# EAGLE board CT_schematic (EAGLE 7.6.0)

Size 100 x 80 mm. Coordinates in mm from the lower left corner, seen from the top.
Outline: 0,0 100,0 100,80 0,80 0,0
Copper layers (1*16): Top 0.035mm / dielectric 1.5mm / Bottom 0.035mm
Design rules "default": minimum track width 10mil, minimum drill 24mil, track to track 8mil, track to pad 8mil, pad to pad 8mil, via to via 8mil, smd to smd 8mil, copper to edge 40mil, drill to drill 8mil, minimum pad ring 10mil, minimum via ring 8mil, stop-mask expansion 4mil, vias tented up to drill 0mil, thermal gap 10mil

## Footprints (pad centres in the part's own frame; a part is rotated, then mirrored left to right if it is on the bottom)
C0603 = smd 0.8 x 0.8: 1 -0.762,0; 2 0.762,0
C0402 = smd 0.5 x 0.5: 1 -0.508,0; 2 0.508,0
C1210 = smd 1.2 x 2.5: 1 -1.524,0; 2 1.524,0
C0805 = smd 1.2 x 1.3: 1 -1.016,0; 2 1.016,0
R0603 = smd 0.8 x 0.8: 1 -0.762,0; 2 0.762,0
EXV-9H = smd 3.505 x 1.676: 1 -2.857,0; 2 2.857,0
L0603 = smd 0.8 x 0.8: 1 -0.762,0; 2 0.762,0
PJ-037B_PACKAGE = drill 3.7 square: 1 12,0 | drill 3.2 square: 2 6,0
UFBGA176 = smd 0.3 x 0.3: A1 0,0; A2 0.65,0; A3 1.3,0; A4 1.95,0; A5 2.6,0; A6 3.25,0; A7 3.9,0; A8 4.55,0; A9 5.2,0; A10 5.85,0; A11 6.5,0; A12 7.15,0; A13 7.8,0; A14 8.45,0; A15 9.1,0; B1 0,-0.65; B2 0.65,-0.65; B3 1.3,-0.65; B4 1.95,-0.65; B5 2.6,-0.65; B6 3.25,-0.65; B7 3.9,-0.65; B8 4.55,-0.65; B9 5.2,-0.65; B10 5.85,-0.65; B11 6.5,-0.65; B12 7.15,-0.65; B13 7.8,-0.65; B14 8.45,-0.65; B15 9.1,-0.65; C1 0,-1.3; C2 0.65,-1.3; C3 1.3,-1.3; C4 1.95,-1.3; C5 2.6,-1.3; C6 3.25,-1.3; C7 3.9,-1.3; C8 4.55,-1.3; C9 5.2,-1.3; C10 5.85,-1.3; C11 6.5,-1.3; C12 7.15,-1.3; C13 7.8,-1.3; C14 8.45,-1.3; C15 9.1,-1.3; D1 0,-1.95; D2 0.65,-1.95; D3 1.3,-1.95; D4 1.95,-1.95; D5 2.6,-1.95; D6 3.25,-1.95; D7 3.9,-1.95; D8 4.55,-1.95; D9 5.2,-1.95; D10 5.85,-1.95; D11 6.5,-1.95; D12 7.15,-1.95; D13 7.8,-1.95; D14 8.45,-1.95; D15 9.1,-1.95; E1 0,-2.6; E2 0.65,-2.6; E3 1.3,-2.6; E4 1.95,-2.6; E12 7.15,-2.6; E13 7.8,-2.6; E14 8.45,-2.6; E15 9.1,-2.6; F1 0,-3.25; F2 0.65,-3.25; F3 1.3,-3.25; F4 1.95,-3.25; F6 3.25,-3.25; F7 3.9,-3.25; F8 4.55,-3.25; F9 5.2,-3.25; F10 5.85,-3.25; F12 7.15,-3.25; F13 7.8,-3.25; F14 8.45,-3.25; F15 9.1,-3.25; G1 0,-3.9; G2 0.65,-3.9; G3 1.3,-3.9; G4 1.95,-3.9; G6 3.25,-3.9; G7 3.9,-3.9; G8 4.55,-3.9; G9 5.2,-3.9; G10 5.85,-3.9; G12 7.15,-3.9; G13 7.8,-3.9; G14 8.45,-3.9; G15 9.1,-3.9; H1 0,-4.55; H2 0.65,-4.55; H3 1.3,-4.55; H4 1.95,-4.55; H6 3.25,-4.55; H7 3.9,-4.55; H8 4.55,-4.55; H9 5.2,-4.55; H10 5.85,-4.55; H12 7.15,-4.55; H13 7.8,-4.55; H14 8.45,-4.55; H15 9.1,-4.55; J1 0,-5.2; J2 0.65,-5.2; J3 1.3,-5.2; J4 1.95,-5.2; J6 3.25,-5.2; J7 3.9,-5.2; J8 4.55,-5.2; J9 5.2,-5.2; J10 5.85,-5.2; J12 7.15,-5.2; J13 7.8,-5.2; J14 8.45,-5.2; J15 9.1,-5.2; K1 0,-5.85; K2 0.65,-5.85; K3 1.3,-5.85; K4 1.95,-5.85; K6 3.25,-5.85; K7 3.9,-5.85; K8 4.55,-5.85; K9 5.2,-5.85; K10 5.85,-5.85; K12 7.15,-5.85; K13 7.8,-5.85; K14 8.45,-5.85; K15 9.1,-5.85; L1 0,-6.5; L2 0.65,-6.5; L3 1.3,-6.5; L4 1.95,-6.5; L12 7.15,-6.5; L13 7.8,-6.5; L14 8.45,-6.5; L15 9.1,-6.5; M1 0,-7.15; M2 0.65,-7.15; M3 1.3,-7.15; M4 1.95,-7.15; M5 2.6,-7.15; M6 3.25,-7.15; M7 3.9,-7.15; M8 4.55,-7.15; M9 5.2,-7.15; M10 5.85,-7.15; M11 6.5,-7.15; M12 7.15,-7.15; M13 7.8,-7.15; M14 8.45,-7.15; M15 9.1,-7.15; N1 0,-7.8; N2 0.65,-7.8; N3 1.3,-7.8; N4 1.95,-7.8; N5 2.6,-7.8; N6 3.25,-7.8; N7 3.9,-7.8; N8 4.55,-7.8; N9 5.2,-7.8; N10 5.85,-7.8; N11 6.5,-7.8; N12 7.15,-7.8; N13 7.8,-7.8; N14 8.45,-7.8; N15 9.1,-7.8; P1 0,-8.45; P2 0.65,-8.45; P3 1.3,-8.45; P4 1.95,-8.45; P5 2.6,-8.45; P6 3.25,-8.45; P7 3.9,-8.45; P8 4.55,-8.45; P9 5.2,-8.45; P10 5.85,-8.45; P11 6.5,-8.45; P12 7.15,-8.45; P13 7.8,-8.45; P14 8.45,-8.45; P15 9.1,-8.45; R1 0,-9.1; R2 0.65,-9.1; R3 1.3,-9.1; R4 1.95,-9.1; R5 2.6,-9.1; R6 3.25,-9.1; R7 3.9,-9.1; R8 4.55,-9.1; R9 5.2,-9.1; R10 5.85,-9.1; R11 6.5,-9.1; R12 7.15,-9.1; R13 7.8,-9.1; R14 8.45,-9.1; R15 9.1,-9.1
DFN-10 = smd 0.965 x 0.305: 1 -1.321,1; 2 -1.321,0.5; 3 -1.321,0; 4 -1.321,-0.5; 5 -1.321,-1; 6 1.321,-1; 7 1.321,-0.5; 8 1.321,0; 9 1.321,0.5; 10 1.321,1
LBGA-64 = smd 0.559 x 0.559: A1 -3.5,3.5; A2 -2.5,3.5; A3 -1.5,3.5; A4 -0.5,3.5; A5 0.5,3.5; A6 1.5,3.5; A7 2.5,3.5; A8 3.5,3.5; B1 -3.5,2.5; B2 -2.5,2.5; B3 -1.5,2.5; B4 -0.5,2.5; B5 0.5,2.5; B6 1.5,2.5; B7 2.5,2.5; B8 3.5,2.5; C1 -3.5,1.5; C2 -2.5,1.5; C3 -1.5,1.5; C4 -0.5,1.5; C5 0.5,1.5; C6 1.5,1.5; C7 2.5,1.5; C8 3.5,1.5; D1 -3.5,0.5; D2 -2.5,0.5; D3 -1.5,0.5; D4 -0.5,0.5; D5 0.5,0.5; D6 1.5,0.5; D7 2.5,0.5; D8 3.5,0.5; E1 -3.5,-0.5; E2 -2.5,-0.5; E3 -1.5,-0.5; E4 -0.5,-0.5; E5 0.5,-0.5; E6 1.5,-0.5; E7 2.5,-0.5; E8 3.5,-0.5; F1 -3.5,-1.5; F2 -2.5,-1.5; F3 -1.5,-1.5; F4 -0.5,-1.5; F5 0.5,-1.5; F6 1.5,-1.5; F7 2.5,-1.5; F8 3.5,-1.5; G1 -3.5,-2.5; G2 -2.5,-2.5; G3 -1.5,-2.5; G4 -0.5,-2.5; G5 0.5,-2.5; G6 1.5,-2.5; G7 2.5,-2.5; G8 3.5,-2.5; H1 -3.5,-3.5; H2 -2.5,-3.5; H3 -1.5,-3.5; H4 -0.5,-3.5; H5 0.5,-3.5; H6 1.5,-3.5; H7 2.5,-3.5; H8 3.5,-3.5
USON-8 = smd 0.3 x 0.4: 1 0,0; 2 0.5,0; 3 1,0; 4 1.5,0; 5 1.5,2.4; 6 1,2.4; 7 0.5,2.4; 8 0,2.4 | smd 1.65 x 0.25: 9 0.75,1.2
RHB32_3P45X3P45 = smd 0.85 x 0.28: 1 -2.475,1.75; 2 -2.475,1.25; 3 -2.475,0.75; 4 -2.475,0.25; 5 -2.475,-0.25; 6 -2.475,-0.75; 7 -2.475,-1.25; 8 -2.475,-1.75; 17 2.475,-1.75; 18 2.475,-1.25; 19 2.475,-0.75; 20 2.475,-0.25; 21 2.475,0.25; 22 2.475,0.75; 23 2.475,1.25; 24 2.475,1.75 | smd 0.28 x 0.85: 9 -1.75,-2.475; 10 -1.25,-2.475; 11 -0.75,-2.475; 12 -0.25,-2.475; 13 0.25,-2.475; 14 0.75,-2.475; 15 1.25,-2.475; 16 1.75,-2.475; 25 1.75,2.475; 26 1.25,2.475; 27 0.75,2.475; 28 0.25,2.475; 29 -0.25,2.475; 30 -0.75,2.475; 31 -1.25,2.475; 32 -1.75,2.475 | smd 3.45 x 3.45: 33 0,0
MICRO_USB_AB = smd 0.4 x 1.35: 1 1.3,0.26; 2 0.65,0.26; 3 0,0.26; 4 -0.65,0.26; 5 -1.3,0.26 | drill 0.6 pad 0.95 long: 6 4.175,-2.54; 7 -4.175,-2.54 | drill 0.7 pad 1.1 long: 8 -2.225,0.46; 9 2.225,0.46
SOT143B = smd 1 x 0.7: 1 -0.75,-1 | smd 0.6 x 0.7: 2 0.95,-1; 3 0.95,1; 4 -0.95,1
SOT-23-6 = smd 1.1 x 0.6: 1 -1.4,0.95; 2 -1.4,0; 3 -1.4,-0.95; 4 1.4,-0.95; 5 1.4,0; 6 1.4,0.95
FCI_10118193-0001LF = smd 0.4 x 1.35: 1 -1.3,2.675; 2 -0.65,2.675; 3 0,2.675; 4 0.65,2.675; 5 1.3,2.675 | smd 1.6 x 1.4: 6 -3.2,2.45; 7 3.2,2.45 | smd 1.9 x 1.9: 8 -1.2,0; 9 1.2,0 | hole 0.5: -3.3,0; 3.3,0
ASEK = smd 1.4 x 1: 1 -1.1,-0.8; 2 1.1,-0.8; 3 1.1,0.8; 4 -1.1,0.8
ASFL1 = smd 1.7 x 1.5: 1 -1.27,-1.1; 2 1.27,-1.1; 3 1.27,1.1; 4 -1.27,1.1
WSON-8 = smd 0.3 x 0.6: 1 -0.75,0; 2 0.05,0; 3 0.85,0; 4 1.65,0; 5 1.65,3.8; 6 0.85,3.8; 7 0.05,3.8; 8 -0.75,3.8 | smd 3 x 2.6: PAD 0.45,1.9
QFN-38_UHF = smd 0.75 x 0.3: 1 -2.4,2.75; 2 -2.4,2.25; 3 -2.4,1.75; 4 -2.4,1.25; 6 -2.4,0.25; 7 -2.4,-0.25; 8 -2.4,-0.75; 9 -2.4,-1.25; 10 -2.4,-1.75; 11 -2.4,-2.25; 12 -2.4,-2.75; 20 2.4,-2.75; 21 2.4,-2.25; 22 2.4,-1.75; 23 2.4,-1.25; 24 2.4,-0.75; 25 2.4,-0.25; 26 2.4,0.25; 27 2.4,0.75; 28 2.4,1.25; 29 2.4,1.75; 30 2.4,2.25; 31 2.4,2.75 | smd 0.758 x 0.3: 5 -2.4,0.75 | smd 0.3 x 0.75: 13 -1.5,-3.4; 14 -1,-3.4; 15 -0.5,-3.4; 16 0,-3.4; 17 0.5,-3.4; 18 1,-3.4; 19 1.5,-3.4; 32 1.5,3.4; 33 1,3.4; 34 0.5,3.4; 35 0,3.4; 36 -0.5,3.4; 37 -1,3.4; 38 -1.5,3.4 | smd 3.2 x 5.2: 39 0,0
IRF8306MTRPBF = smd 0.9 x 1.85: 1 0,0; 2 0,-2.35; 6 6.4,0; 7 6.4,-2.35 | smd 0.75 x 0.75: 3 1.75,-1.175 | smd 1.45 x 0.87: 4 3.5,-0.565; 5 3.5,-1.785
SW_4-1437565-2 = smd 1.4 x 2.1: 1 -2.23,4.55; 2 -2.23,-4.55; 3 2.23,4.55; 4 2.23,-4.55
LGM67K-G1J2-24-Z = smd 0.8 x 1.4: A -2,0; C 0,0
NC7SZ125M5X = smd 1.3 x 0.7: 1 -1.3,0.95; 2 -1.3,0; 3 -1.3,-0.95; 4 1.3,-0.95; 5 1.3,0.95
DUMMY_PACKAGE_324 = drill 0.3: 1 0,-1; 2 1.5,-1

## Placement (x,y rotation side)
C1  1e-06  [C0603]  -34.29,72.39 0 top  (outside the outline)
C2  1e-07  [C0603]  -38.1,72.39 0 top  (outside the outline)
C3  1e-07  [C0603]  -41.91,72.39 0 top  (outside the outline)
C4  1e-07  [C0603]  -45.72,72.39 0 top  (outside the outline)
C5  1e-07  [C0603]  -49.53,72.39 0 top  (outside the outline)
C6  1e-07  [C0603]  -53.34,72.39 0 top  (outside the outline)
C7  1e-07  [C0603]  -57.15,72.39 0 top  (outside the outline)
C8  1e-07  [C0603]  -60.96,72.39 0 top  (outside the outline)
C9  1e-07  [C0603]  -64.77,72.39 0 top  (outside the outline)
C10  1e-07  [C0603]  -68.58,72.39 0 top  (outside the outline)
C11  1e-07  [C0603]  -72.39,72.39 0 top  (outside the outline)
C12  1e-07  [C0603]  -76.2,72.39 0 top  (outside the outline)
C13  1e-07  [C0603]  -80.01,72.39 0 top  (outside the outline)
C14  1e-07  [C0603]  -83.82,72.39 0 top  (outside the outline)
C15  1e-07  [C0603]  -15.24,77.47 0 top  (outside the outline)
C16  1e-07  [C0603]  -19.05,77.47 0 top  (outside the outline)
C17  4.7e-06  [C0603]  -19.05,72.39 0 top  (outside the outline)
C18  1e-08  [C0603]  -22.86,77.47 0 top  (outside the outline)
C19  1e-06  [C0603]  -26.67,77.47 0 top  (outside the outline)
C20  1e-07  [C0603]  -30.48,77.47 0 top  (outside the outline)
C21  1e-07  [C0603]  -34.29,77.47 0 top  (outside the outline)
C22  1e-07  [C0603]  -38.1,77.47 0 top  (outside the outline)
C23  1e-06  [C0603]  -41.91,77.47 0 top  (outside the outline)
C24  1e-07  [C0402]  -49.53,82.55 0 top  (outside the outline)
C25  1e-07  [C0402]  -53.34,82.55 0 top  (outside the outline)
C26  1e-06  [C0603]  -45.72,77.47 0 top  (outside the outline)
C27  1e-07  [C0402]  -57.15,82.55 0 top  (outside the outline)
C28  1e-07  [C0402]  -60.96,82.55 0 top  (outside the outline)
C29  1e-08  [C0402]  -64.77,82.55 0 top  (outside the outline)
C30  1e-08  [C0402]  -68.58,82.55 0 top  (outside the outline)
C31  1e-07  [C0402]  -72.39,82.55 0 top  (outside the outline)
C32  1e-07  [C0402]  -76.2,82.55 0 top  (outside the outline)
C33  2.2e-06  [C0603]  -22.86,72.39 0 top  (outside the outline)
C34  1e-07  [C0402]  -80.01,82.55 0 top  (outside the outline)
C35  1e-07  [C0402]  -83.82,82.55 0 top  (outside the outline)
C36  2.2e-06  [C0603]  -26.67,72.39 0 top  (outside the outline)
C37  1e-06  [C0603]  -49.53,77.47 0 top  (outside the outline)
C38  1e-08  [C0402]  -87.63,82.55 0 top  (outside the outline)
C39  1e-08  [C0402]  -15.24,87.63 0 top  (outside the outline)
C40  1e-08  [C0402]  -19.05,87.63 0 top  (outside the outline)
C41  1e-08  [C0402]  -22.86,87.63 0 top  (outside the outline)
C42  1e-05  [C1210]  -59.69,48.26 0 top  (outside the outline)
C43  1e-05  [C0805]  -45.72,55.88 0 top  (outside the outline)
C44  1e-08  [C0402]  -26.67,87.63 0 top  (outside the outline)
C45  1e-05  [C1210]  -66.04,48.26 0 top  (outside the outline)
C46  1e-05  [C0805]  -50.8,55.88 0 top  (outside the outline)
C47  8e-07  [R0603]  -53.34,77.47 0 top  (outside the outline)
C48  1e-05  [C1210]  -72.39,48.26 0 top  (outside the outline)
C49  1e-08  [C0402]  -30.48,87.63 0 top  (outside the outline)
C50  1e-05  [C1210]  -78.74,48.26 0 top  (outside the outline)
C51  1e-05  [C1210]  -85.09,48.26 0 top  (outside the outline)
C52  1e-08  [C0402]  -34.29,87.63 0 top  (outside the outline)
C53  1e-05  [C1210]  -16.51,57.15 0 top  (outside the outline)
C54  1e-05  [C0805]  -55.88,55.88 0 top  (outside the outline)
C55  1e-07  [C0402]  -38.1,87.63 0 top  (outside the outline)
C56  2.2e-06  [C0603]  -30.48,72.39 0 top  (outside the outline)
C57  2.45e-08  [R0603]  -60.96,62.23 0 top  (outside the outline)
C58  2.8258362168397e-09  [R0603]  -66.04,55.88 0 top  (outside the outline)
C59  7.105e-09  [R0603]  -83.82,55.88 0 top  (outside the outline)
C60  0.0001  [EXV-9H]  -17.78,49.53 0 top  (outside the outline)
C61  0.0001  [EXV-9H]  -29.21,49.53 0 top  (outside the outline)
C62  1e-08  [C0402]  -41.91,87.63 0 top  (outside the outline)
C63  1e-08  [C0402]  -45.72,87.63 0 top  (outside the outline)
C64  1e-08  [C0402]  -49.53,87.63 0 top  (outside the outline)
F1  240.0  [L0603]  -57.15,77.47 0 top  (outside the outline)
J1  PJ-037B  [PJ-037B_PACKAGE]  -41.91,7.62 0 top  (outside the outline)
R2  1000.0  [R0603]  -60.96,77.47 0 top  (outside the outline)
R7  4700.0  [R0603]  -64.77,77.47 0 top  (outside the outline)
R8  4700.0  [R0603]  -68.58,77.47 0 top  (outside the outline)
R9  4700.0  [R0603]  -72.39,77.47 0 top  (outside the outline)
R10  2200.0  [R0603]  -76.2,77.47 0 top  (outside the outline)
R12  2200.0  [R0603]  -80.01,77.47 0 top  (outside the outline)
R14  10000.0  [R0603]  -66.04,62.23 0 top  (outside the outline)
R15  10000.0  [R0603]  -71.12,62.23 0 top  (outside the outline)
R16  10000.0  [R0603]  -76.2,62.23 0 top  (outside the outline)
R17  10000.0  [R0603]  -81.28,62.23 0 top  (outside the outline)
R18  10000.0  [R0603]  -86.36,62.23 0 top  (outside the outline)
R19  10000.0  [R0603]  -15.24,67.31 0 top  (outside the outline)
R20  10000.0  [R0603]  -20.32,67.31 0 top  (outside the outline)
R21  10000.0  [R0603]  -25.4,67.31 0 top  (outside the outline)
R22  10000.0  [R0603]  -30.48,67.31 0 top  (outside the outline)
R23  100000.0  [R0603]  -15.24,62.23 0 top  (outside the outline)
R24  100000.0  [R0603]  -20.32,62.23 0 top  (outside the outline)
R25  100000.0  [R0603]  -25.4,62.23 0 top  (outside the outline)
R26  47000.0  [R0603]  -35.56,67.31 0 top  (outside the outline)
R27  10000.0  [R0603]  -40.64,67.31 0 top  (outside the outline)
R28  10000.0  [R0603]  -45.72,67.31 0 top  (outside the outline)
R29  100000.0  [R0603]  -30.48,62.23 0 top  (outside the outline)
R30  200.0  [R0603]  -83.82,77.47 0 top  (outside the outline)
R31  1000.0  [R0603]  -15.24,82.55 0 top  (outside the outline)
R32  100000.0  [R0603]  -35.56,62.23 0 top  (outside the outline)
R33  806.0  [R0603]  -19.05,82.55 0 top  (outside the outline)
R34  1000.0  [R0603]  -22.86,82.55 0 top  (outside the outline)
R35  100000.0  [R0603]  -40.64,62.23 0 top  (outside the outline)
R36  153694.38  [R0603]  -78.74,55.88 0 top  (outside the outline)
R37  100000.0  [R0603]  -45.72,62.23 0 top  (outside the outline)
R38  100000.0  [R0603]  -50.8,62.23 0 top  (outside the outline)
R39  3900.0  [R0603]  -26.67,82.55 0 top  (outside the outline)
R40  1000.0  [R0603]  -30.48,82.55 0 top  (outside the outline)
R41  100000.0  [R0603]  -55.88,62.23 0 top  (outside the outline)
R42  200.0  [R0603]  -34.29,82.55 0 top  (outside the outline)
R43  1000.0  [R0603]  -38.1,82.55 0 top  (outside the outline)
R44  10000.0  [R0603]  -50.8,67.31 0 top  (outside the outline)
R45  75000.0  [R0603]  -55.88,67.31 0 top  (outside the outline)
R46  10000.0  [R0603]  -60.96,67.31 0 top  (outside the outline)
R47  10000.0  [R0603]  -66.04,67.31 0 top  (outside the outline)
R48  95300.0  [R0603]  -71.12,67.31 0 top  (outside the outline)
R49  95300.0  [R0603]  -76.2,67.31 0 top  (outside the outline)
R50  10000.0  [R0603]  -81.28,67.31 0 top  (outside the outline)
R51  10000.0  [R0603]  -86.36,67.31 0 top  (outside the outline)
R52  10000.0  [R0603]  -15.24,72.39 0 top  (outside the outline)
R53  103345.45454545  [R0603]  -73.66,55.88 0 top  (outside the outline)
U1  STM32F469IGH6  [UFBGA176]  -85.09,10.16 0 top  (outside the outline)
U2  MAG3110FCR1  [DFN-10]  -43.18,82.55 0 top  (outside the outline)
U3  mt28ew256aba1HPC-0SIT  [LBGA-64]  -19.05,7.62 0 top  (outside the outline)
U4  SST26WF080BT-104I/NP  [USON-8]  -53.34,86.36 0 top  (outside the outline)
U5  TUSB1210BRHBR  [RHB32_3P45X3P45]  -39.37,49.53 0 top  (outside the outline)
U6  47590-0001  [MICRO_USB_AB]  -50.8,7.62 0 top  (outside the outline)
U7  prtr5v0u2ax  [SOT143B]  -66.04,87.63 0 top  (outside the outline)
U8  MAX4995AAUT+T  [SOT-23-6]  -21.59,55.88 0 top  (outside the outline)
U9  10118193-0001LF  [FCI_10118193-0001LF]  -53.34,39.37 0 top  (outside the outline)
U10  prtr5v0u2ax  [SOT143B]  -78.74,87.63 0 top  (outside the outline)
U11  ASEK-32.768KHz-ECST  [ASEK]  -83.82,39.37 0 top  (outside the outline)
U12  ASFL1-19.2MHZ-NCS  [ASFL1]  -27.94,40.64 0 top  (outside the outline)
U13  ASFL1-25MHZ-NCS  [ASFL1]  -44.45,40.64 0 top  (outside the outline)
U14  LP3878SDX-ADJ/NOPB  [WSON-8]  -60.96,19.05 0 top  (outside the outline)
U15  LP3878SDX-ADJ/NOPB  [WSON-8]  -81.28,19.05 0 top  (outside the outline)
U16  LP2951ACSDX/NOPB  [WSON-8]  -68.58,29.21 0 top  (outside the outline)
U17  LP3878SDX-ADJ/NOPB  [WSON-8]  -30.48,29.21 0 top  (outside the outline)
U18  LP3878SDX-ADJ/NOPB  [WSON-8]  -50.8,29.21 0 top  (outside the outline)
U19  LTC2928CUHF#PBF  [QFN-38_UHF]  -62.23,39.37 0 top  (outside the outline)
U20  IRF8306MTRPbF  [IRF8306MTRPBF]  -26.67,22.86 0 top  (outside the outline)
U21  IRF8306MTRPbF  [IRF8306MTRPBF]  -41.91,22.86 0 top  (outside the outline)
U22  4-1437565-2  [SW_4-1437565-2]  -71.12,6.35 0 top  (outside the outline)
U23  Q65110A2395  [LGM67K-G1J2-24-Z]  -48.26,48.26 0 top  (outside the outline)
U24  nc7sz125m5x  [NC7SZ125M5X]  -26.67,55.88 0 top  (outside the outline)
U25  nc7sz125m5x  [NC7SZ125M5X]  -33.02,55.88 0 top  (outside the outline)
U26  nc7sz125m5x  [NC7SZ125M5X]  -39.37,55.88 0 top  (outside the outline)
U27  Dummy  [DUMMY_PACKAGE_324]  -83.82,87.63 0 top  (outside the outline)

## Library data of the parts
C1-C64 F1 J1 R2 R7-R10 R12 R14-R53 U1-U27 = circuit_tree

## Nets
CLK_U1_E1: U1.E1 U11.3
CLK_U1_G1: U1.G1 U13.3
CLK_U5_1: U5.1 U12.3
GND: C1.2 C2.2 C3.2 C4.2 C5.2 C6.2 C7.2 C8.2 C9.2 C10.2 C11.2 C12.2 C13.2 C14.2 C15.2 C16.2 C17.2 C18.2 C19.2 C20.2 C21.2 C22.2 C23.2 C24.2 C25.2 C26.2 C27.2 C28.2 C29.2 C30.2 C31.2 C32.2 C33.2 C34.2 C35.2 C36.2 C37.2 C38.2 C39.2 C40.2 C41.2 C42.2 C43.2 C44.2 C45.2 C46.2 C47.2 C48.2 C49.2 C50.2 C51.2 C52.2 C53.2 C54.2 C55.2 C56.2 C57.2 C58.2 C59.2 C60.2 C61.2 C62.2 C63.2 C64.2 J1.2 R2.2 R16.2 R26.2 R28.2 R31.2 R34.2 R37.2 R40.2 R43.2 R45.2 R48.2 R49.2 R50.2 R51.2 R52.2 U1.C15 U1.D5 U1.D7 U1.D8 U1.D9 U1.F2 U1.F6 U1.F7 U1.F8 U1.F9 U1.F10 U1.F12 U1.G2 U1.G6 U1.G7 U1.G8 U1.G9 U1.G10 U1.G12 U1.H6 U1.H7 U1.H8 U1.H9 U1.H10 U1.H12 U1.J6 U1.J7 U1.J8 U1.J9 U1.J10 U1.K6 U1.K7 U1.K8 U1.K9 U1.K10 U1.M1 U1.M8 U1.M9 U1.N1 U2.5 U2.10 U3.E8 U3.H2 U3.H7 U4.4 U4.9 U5.33 U6.5 U6.6 U6.7 U6.8 U6.9 U7.1 U8.2 U9.5 U9.6 U9.7 U9.8 U9.9 U10.1 U11.2 U12.2 U13.2 U14.3 U14.PAD U15.3 U15.PAD U16.3 U16.4 U16.PAD U17.3 U17.PAD U18.3 U18.PAD U19.8 U19.9 U19.10 U19.12 U19.13 U19.24 U19.25 U19.30 U19.32 U19.39 U23.C U24.1 U24.3 U25.1 U25.3 U26.1 U26.3 U27.1
NET_U1_A5: R10.1 U1.A5 U2.7
NET_U1_B4: R12.1 U1.B4 U2.6
NET_U1_C6: R14.1 U1.C6
NET_U1_D6: R15.1 U1.D6
NET_U1_D13: U1.D13
NET_U1_F13: C22.1 U1.F13
NET_U1_J1: R8.1 U1.J1 U25.4
NET_U1_K12: U1.K12
NET_U1_L4: R17.1 U1.L4
NET_U1_M6: R16.1 U1.M6
NET_U1_R1: C18.1 C19.1 F1.1 U1.P1 U1.R1
NET_U1_R14: U23.A
NET_U1_R15: U22.3 U22.4
NET_U2_1: C24.1 U2.1
NET_U2_4: C27.1 U2.4
NET_U3_B4: R21.1 U3.B4
NET_U3_B5: R7.1 U3.B5 U24.4
NET_U5_11: R27.1 U5.11
NET_U5_12: C36.1 U5.12
NET_U5_14: R28.1 U5.14
NET_U5_20: C33.1 U5.20
NET_U5_27: R9.1 U5.27 U26.4
NET_U6_1: C37.1 U5.22 U6.1 U7.4 U8.1
NET_U6_2: U5.19 U6.2 U7.3
NET_U6_3: U5.18 U6.3 U7.2
NET_U6_4: U5.23 U6.4
NET_U8_3: R26.1 U8.3
NET_U8_4: U5.17 U8.4
NET_U14_1: C41.1 U14.1
NET_U14_6: R30.2 R31.1 U14.6
NET_U14_8: R29.1 U14.8
NET_U15_1: C44.1 U15.1
NET_U15_6: R33.2 R34.1 U15.6
NET_U15_8: R32.1 U15.8
NET_U16_5: R35.1 U16.5
NET_U16_7: R36.2 R37.1 U16.7
NET_U17_1: C49.1 U17.1
NET_U17_6: R39.2 R40.1 U17.6
NET_U17_8: R38.1 U17.8
NET_U18_1: C52.1 U18.1
NET_U18_6: R42.2 R43.1 U18.6
NET_U18_8: R41.1 U18.8
NET_U19_3: R51.1 U19.3
NET_U19_6: R48.1 U19.6
NET_U19_7: R49.1 U19.7
NET_U19_16: R50.1 R53.1 U19.16
NET_U19_18: R47.1 U19.18
NET_U19_19: R46.1 U19.19 U19.20
NET_U19_21: R44.1 R45.1 U19.21 U24.2 U25.2 U26.2
NET_U19_22: C55.1 R44.2 R46.2 R47.2 U19.11 U19.22
NET_U19_26: C58.1 U19.26
NET_U19_27: C57.1 U19.27
NET_U19_28: C59.1 U19.28
NET_U19_38: R52.1 U19.38
NET_U20_3: U19.2 U20.3
NET_U21_3: U19.37 U21.3
NET_U22_1: R2.1 U22.1 U22.2
PROC_DAC_OUT1: U1.N4 U27.2
PROC_FMC_A0: U1.E2 U3.E2
PROC_FMC_A1: U1.H3 U3.D2
PROC_FMC_A2: U1.H2 U3.C2
PROC_FMC_A3: U1.J2 U3.A2
PROC_FMC_A4: U1.J3 U3.B2
PROC_FMC_A5: U1.K3 U3.D3
PROC_FMC_A6: U1.P6 U3.C3
PROC_FMC_A7: U1.N6 U3.A3
PROC_FMC_A8: U1.R7 U3.B6
PROC_FMC_A9: U1.P7 U3.A6
PROC_FMC_A10: U1.N7 U3.C6
PROC_FMC_A11: U1.M7 U3.D6
PROC_FMC_A12: U1.L15 U3.B7
PROC_FMC_A13: U1.K15 U3.A7
PROC_FMC_A14: U1.K14 U3.C7
PROC_FMC_A15: U1.K13 U3.D7
PROC_FMC_A16: U1.N14 U3.E7
PROC_FMC_A17: U1.N13 U3.B3
PROC_FMC_A18: U1.M15 U3.C4
PROC_FMC_A19: U1.A1 U3.D5
PROC_FMC_A20: U1.B1 U3.D4
PROC_FMC_A21: U1.B2 U3.C5
PROC_FMC_A22: U1.B3 U3.B8
PROC_FMC_A23: U1.A2 U3.C8
PROC_FMC_D0: U1.M14 U3.E3
PROC_FMC_D1: U1.L14 U3.H3
PROC_FMC_D2: U1.B12 U3.E4
PROC_FMC_D3: U1.C12 U3.H4
PROC_FMC_D4: U1.R8 U3.H5
PROC_FMC_D5: U1.P8 U3.E5
PROC_FMC_D6: U1.P9 U3.H6
PROC_FMC_D7: U1.R9 U3.E6
PROC_FMC_D8: U1.P10 U3.F3
PROC_FMC_D9: U1.R10 U3.G3
PROC_FMC_D10: U1.N11 U3.F4
PROC_FMC_D11: U1.P11 U3.G4
PROC_FMC_D12: U1.R11 U3.F5
PROC_FMC_D13: U1.P15 U3.G6
PROC_FMC_D14: U1.P14 U3.F6
PROC_FMC_D15: U1.N15 U3.G7
PROC_FMC_NBL0: R22.1 U1.A4 U3.F7
PROC_FMC_NE2: R18.1 U1.C10 U3.F2
PROC_FMC_NOE: R19.1 U1.D10 U3.G2
PROC_FMC_NWAIT: U1.B11 U3.A4
PROC_FMC_NWE: R20.1 U1.C11 U3.A5
PROC_QUADSPI_BK1_IO0: U1.F14 U4.5
PROC_QUADSPI_BK1_IO1: U1.B14 U4.2
PROC_QUADSPI_BK1_IO2: R24.1 U1.K1 U4.3
PROC_QUADSPI_BK1_IO3: R25.1 U1.K2 U4.7
PROC_QUADSPI_BK1_NCS: R23.1 U1.B6 U4.1
PROC_QUADSPI_CLK: U1.L1 U4.6
PROC_USB_OTG_FS_DM: U1.C15 U9.2 U10.3
PROC_USB_OTG_FS_DP: U1.B15 U9.3 U10.2
PROC_USB_OTG_FS_VBUS: C23.1 U1.E15 U9.1 U10.4
PROC_USB_OTG_HS_ULPI_CK: U1.P4 U5.26
PROC_USB_OTG_HS_ULPI_D0: U1.R2 U5.3
PROC_USB_OTG_HS_ULPI_D1: U1.R5 U5.4
PROC_USB_OTG_HS_ULPI_D2: U1.R4 U5.5
PROC_USB_OTG_HS_ULPI_D3: U1.R12 U5.6
PROC_USB_OTG_HS_ULPI_D4: U1.R13 U5.7
PROC_USB_OTG_HS_ULPI_D5: U1.P12 U5.9
PROC_USB_OTG_HS_ULPI_D6: U1.P13 U5.10
PROC_USB_OTG_HS_ULPI_D7: U1.A6 U5.13
PROC_USB_OTG_HS_ULPI_DIR: U1.E4 U5.31
PROC_USB_OTG_HS_ULPI_NXT: U1.H4 U5.2
PROC_USB_OTG_HS_ULPI_STP: U1.M2 U5.29
VCC_12V7: C56.1 C60.1 C61.1 J1.1 R53.2 U19.23 U20.1 U20.2 U20.6 U20.7 U21.1 U21.2 U21.6 U21.7
VCC_S1_12V7: C42.1 C45.1 C47.1 C50.1 R29.2 R32.2 R38.2 U14.4 U15.4 U16.8 U17.4 U20.4 U20.5
VCC_S2_12V7: C53.1 R41.2 U18.4 U21.4 U21.5
VCC_TIER1_1V2: C21.1 C43.1 R30.1 U1.M10 U14.5
VCC_TIER1_1V8: C1.1 C2.1 C3.1 C4.1 C5.1 C6.1 C7.1 C8.1 C9.1 C10.1 C11.1 C12.1 C13.1 C14.1 C15.1 C16.1 C17.1 C20.1 C28.1 C29.1 C31.1 C34.1 C35.1 C46.1 C62.1 C63.1 C64.1 F1.2 R7.2 R8.2 R9.2 R10.2 R12.2 R14.2 R15.2 R17.2 R18.2 R19.2 R20.2 R21.2 R22.2 R23.2 R24.2 R25.2 R27.2 R33.1 U1.C1 U1.C5 U1.C7 U1.C8 U1.C9 U1.F3 U1.G3 U1.G13 U1.H13 U1.J12 U1.J13 U1.K4 U1.N8 U1.N9 U1.N10 U2.8 U3.D8 U3.F1 U4.8 U5.28 U5.30 U5.32 U15.5 U24.5 U25.5 U26.5
VCC_TIER1_3V3: C25.1 C26.1 C30.1 C32.1 C38.1 C39.1 C40.1 C48.1 R35.2 R36.1 U2.2 U3.G5 U5.21 U11.4 U12.4 U13.4 U16.1
VCC_TIER1_5V0: C51.1 R39.1 U8.5 U17.5
VCC_TIER2_1V2: C54.1 R42.1 U18.5

## Tracks (layer width: path | path; a pad name or v marks a point on that pad's centre or on a via)
CLK_U1_E1  (1 unrouted)
CLK_U1_G1  (1 unrouted)
CLK_U5_1  (1 unrouted)
GND  (171 unrouted)
NET_U1_A5  (2 unrouted)
NET_U1_B4  (2 unrouted)
NET_U1_C6  (1 unrouted)
NET_U1_D6  (1 unrouted)
NET_U1_F13  (1 unrouted)
NET_U1_J1  (2 unrouted)
NET_U1_L4  (1 unrouted)
NET_U1_M6  (1 unrouted)
NET_U1_R1  (4 unrouted)
NET_U1_R15  (1 unrouted)
NET_U2_1  (1 unrouted)
NET_U2_4  (1 unrouted)
NET_U3_B4  (1 unrouted)
NET_U3_B5  (2 unrouted)
NET_U5_11  (1 unrouted)
NET_U5_12  (1 unrouted)
NET_U5_14  (1 unrouted)
NET_U5_20  (1 unrouted)
NET_U5_27  (2 unrouted)
NET_U6_1  (4 unrouted)
NET_U6_2  (2 unrouted)
NET_U6_3  (2 unrouted)
NET_U6_4  (1 unrouted)
NET_U8_3  (1 unrouted)
NET_U8_4  (1 unrouted)
NET_U14_1  (1 unrouted)
NET_U14_6  (2 unrouted)
NET_U14_8  (1 unrouted)
NET_U15_1  (1 unrouted)
NET_U15_6  (2 unrouted)
NET_U15_8  (1 unrouted)
NET_U16_5  (1 unrouted)
NET_U16_7  (2 unrouted)
NET_U17_1  (1 unrouted)
NET_U17_6  (2 unrouted)
NET_U17_8  (1 unrouted)
NET_U18_1  (1 unrouted)
NET_U18_6  (2 unrouted)
NET_U18_8  (1 unrouted)
NET_U19_3  (1 unrouted)
NET_U19_6  (1 unrouted)
NET_U19_7  (1 unrouted)
NET_U19_16  (2 unrouted)
NET_U19_18  (1 unrouted)
NET_U19_19  (2 unrouted)
NET_U19_21  (5 unrouted)
NET_U19_22  (5 unrouted)
NET_U19_26  (1 unrouted)
NET_U19_27  (1 unrouted)
NET_U19_28  (1 unrouted)
NET_U19_38  (1 unrouted)
NET_U20_3  (1 unrouted)
NET_U21_3  (1 unrouted)
NET_U22_1  (2 unrouted)
PROC_DAC_OUT1  (1 unrouted)
PROC_FMC_A0  (1 unrouted)
PROC_FMC_A1  (1 unrouted)
PROC_FMC_A2  (1 unrouted)
PROC_FMC_A3  (1 unrouted)
PROC_FMC_A4  (1 unrouted)
PROC_FMC_A5  (1 unrouted)
PROC_FMC_A6  (1 unrouted)
PROC_FMC_A7  (1 unrouted)
PROC_FMC_A8  (1 unrouted)
PROC_FMC_A9  (1 unrouted)
PROC_FMC_A10  (1 unrouted)
PROC_FMC_A11  (1 unrouted)
PROC_FMC_A12  (1 unrouted)
PROC_FMC_A13  (1 unrouted)
PROC_FMC_A14  (1 unrouted)
PROC_FMC_A15  (1 unrouted)
PROC_FMC_A16  (1 unrouted)
PROC_FMC_A17  (1 unrouted)
PROC_FMC_A18  (1 unrouted)
PROC_FMC_A19  (1 unrouted)
PROC_FMC_A20  (1 unrouted)
PROC_FMC_A21  (1 unrouted)
PROC_FMC_A22  (1 unrouted)
PROC_FMC_A23  (1 unrouted)
PROC_FMC_D0  (1 unrouted)
PROC_FMC_D1  (1 unrouted)
PROC_FMC_D2  (1 unrouted)
PROC_FMC_D3  (1 unrouted)
PROC_FMC_D4  (1 unrouted)
PROC_FMC_D5  (1 unrouted)
PROC_FMC_D6  (1 unrouted)
PROC_FMC_D7  (1 unrouted)
PROC_FMC_D8  (1 unrouted)
PROC_FMC_D9  (1 unrouted)
PROC_FMC_D10  (1 unrouted)
PROC_FMC_D11  (1 unrouted)
PROC_FMC_D12  (1 unrouted)
PROC_FMC_D13  (1 unrouted)
PROC_FMC_D14  (1 unrouted)
PROC_FMC_D15  (1 unrouted)
PROC_FMC_NBL0  (2 unrouted)
PROC_FMC_NE2  (2 unrouted)
PROC_FMC_NOE  (2 unrouted)
PROC_FMC_NWAIT  (1 unrouted)
PROC_FMC_NWE  (2 unrouted)
PROC_QUADSPI_BK1_IO0  (1 unrouted)
PROC_QUADSPI_BK1_IO1  (1 unrouted)
PROC_QUADSPI_BK1_IO2  (2 unrouted)
PROC_QUADSPI_BK1_IO3  (2 unrouted)
PROC_QUADSPI_BK1_NCS  (2 unrouted)
PROC_QUADSPI_CLK  (1 unrouted)
PROC_USB_OTG_FS_DM  (2 unrouted)
PROC_USB_OTG_FS_DP  (2 unrouted)
PROC_USB_OTG_FS_VBUS  (3 unrouted)
PROC_USB_OTG_HS_ULPI_CK  (1 unrouted)
PROC_USB_OTG_HS_ULPI_D0  (1 unrouted)
PROC_USB_OTG_HS_ULPI_D1  (1 unrouted)
PROC_USB_OTG_HS_ULPI_D2  (1 unrouted)
PROC_USB_OTG_HS_ULPI_D3  (1 unrouted)
PROC_USB_OTG_HS_ULPI_D4  (1 unrouted)
PROC_USB_OTG_HS_ULPI_D5  (1 unrouted)
PROC_USB_OTG_HS_ULPI_D6  (1 unrouted)
PROC_USB_OTG_HS_ULPI_D7  (1 unrouted)
PROC_USB_OTG_HS_ULPI_DIR  (1 unrouted)
PROC_USB_OTG_HS_ULPI_NXT  (1 unrouted)
PROC_USB_OTG_HS_ULPI_STP  (1 unrouted)
VCC_12V7  (13 unrouted)
VCC_S1_12V7  (12 unrouted)
VCC_S2_12V7  (4 unrouted)
VCC_TIER1_1V2  (4 unrouted)
VCC_TIER1_1V8  (71 unrouted)
VCC_TIER1_3V3  (16 unrouted)
VCC_TIER1_5V0  (3 unrouted)
VCC_TIER2_1V2  (2 unrouted)